# EAGLE board PCB (EAGLE 9.7.0)
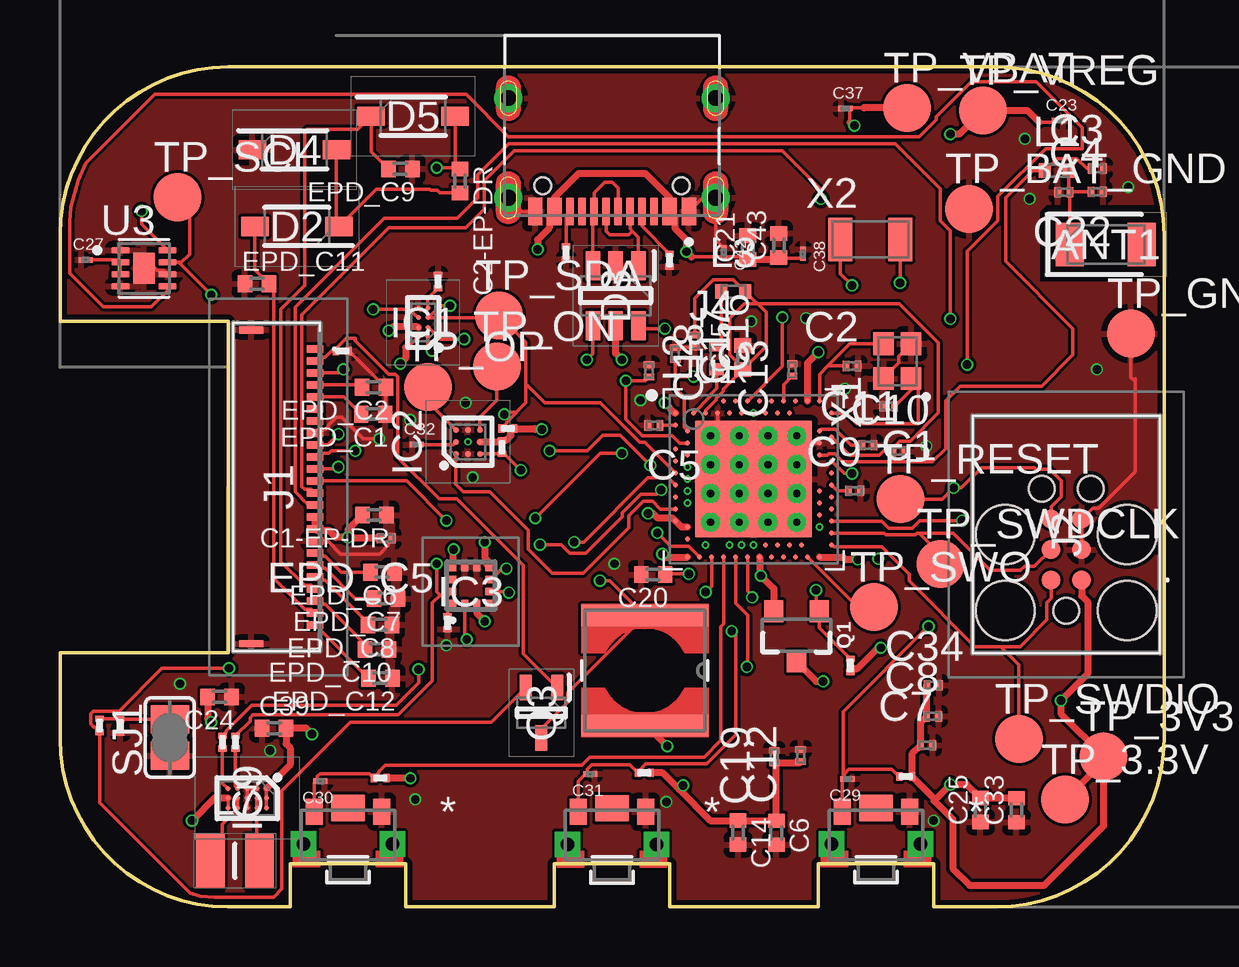
[diagram p0: board, top side]
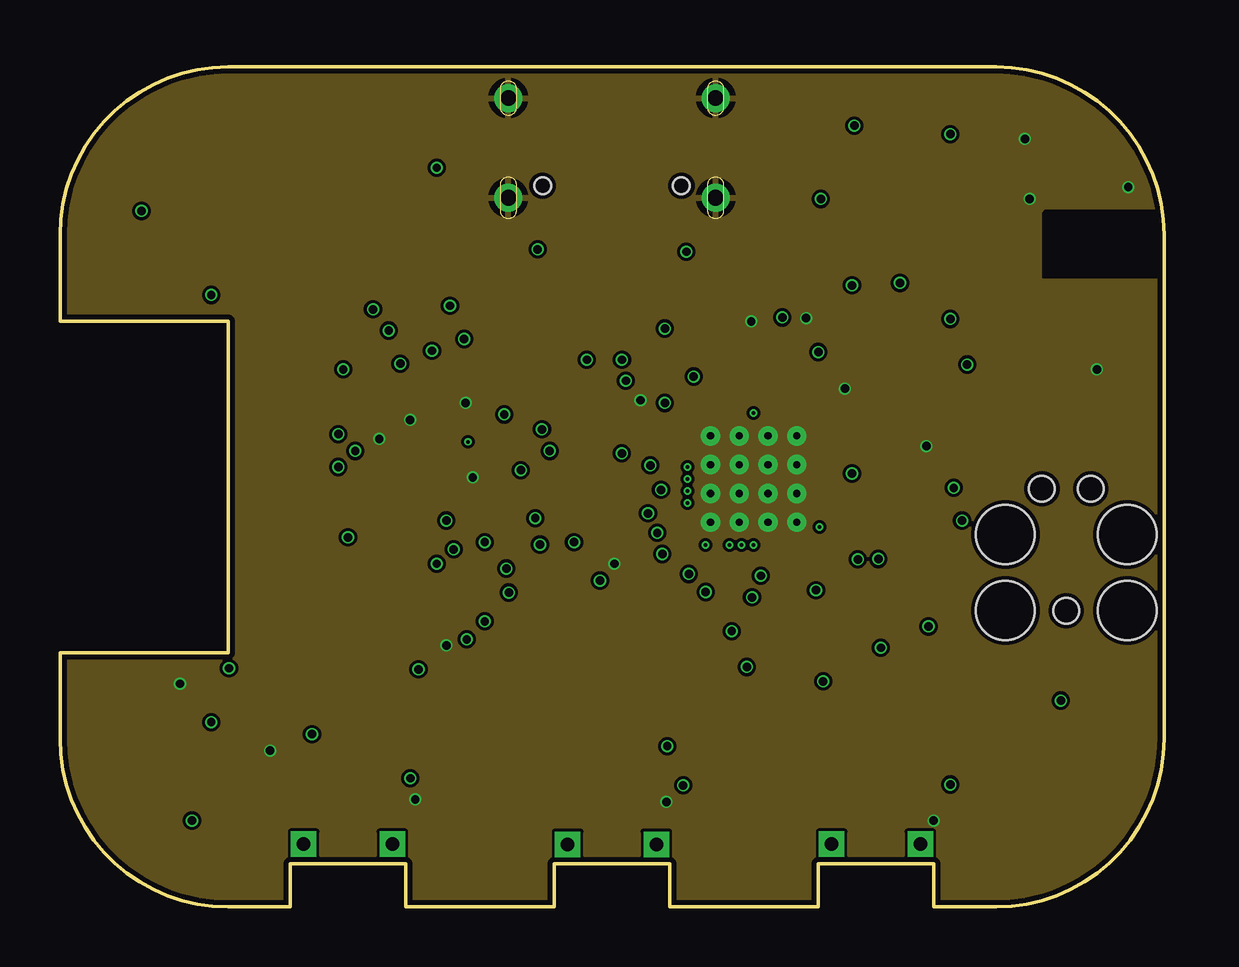
[diagram p1: board, inner layer Route2]
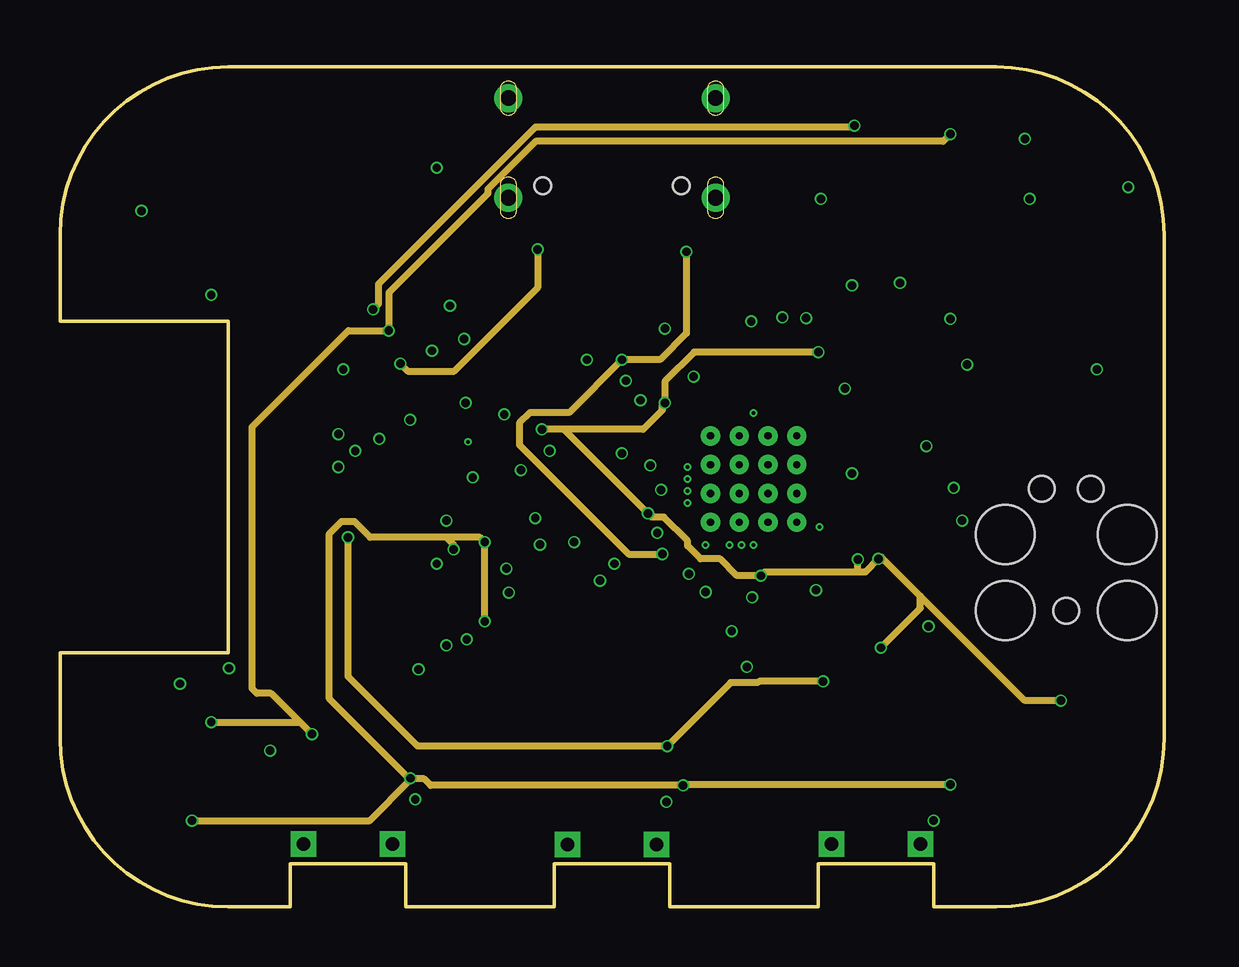
[diagram p2: board, inner layer Route15]
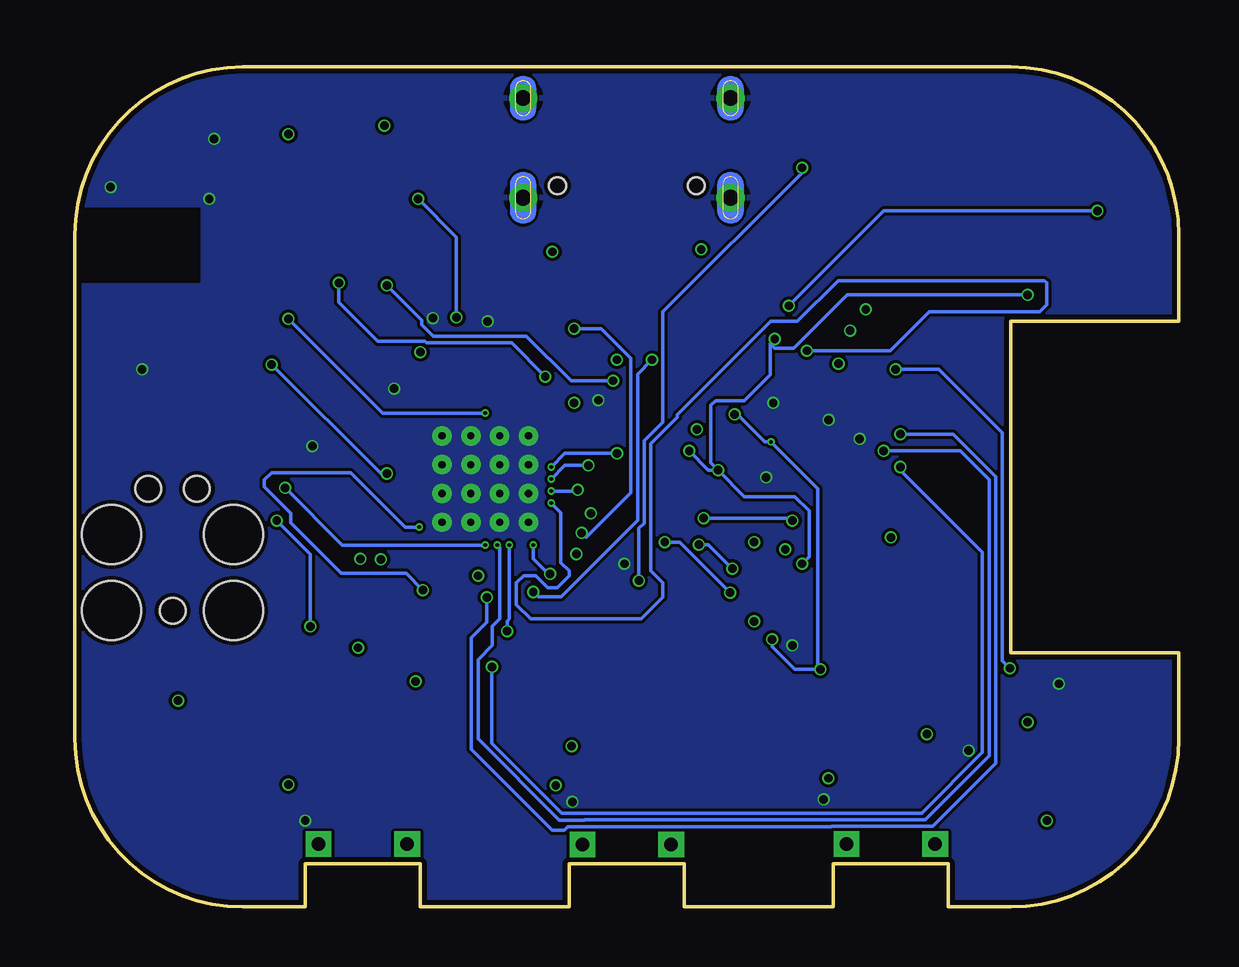
[diagram p3: board, bottom side, seen from below]

Size 46 x 35 mm. Coordinates in mm from the lower left corner, seen from the top.
Outline: 39,0 36.4,0 36.4,1.8 31.6,1.8 31.6,0 25.4,0 25.4,1.8 20.6,1.8 20.6,0 14.4,0 14.4,1.8 9.6,1.8 9.6,0 7,0 arc-90 0,7 0,10.6 7,10.6 7,24.4 0,24.4 0,28 arc-90 7,35 39,35 arc-90 46,28 46,7 arc-90 39,0
Copper layers (1+2*15+16): Top 0.035mm / dielectric 1.6mm / Route2 0.035mm / dielectric 0.15mm / Route15 0.035mm / dielectric 0.2mm / Bottom 0.035mm
Design rules "jlcpcb-2layers.dru *": minimum track width 5mil, minimum drill 0.3mm, track to track 5mil, track to pad 5mil, pad to pad 5mil, via to via 5mil, smd to smd 5mil, copper to edge 0.2mm, drill to drill 6mil, minimum pad ring 10mil, minimum via ring 3mil, stop-mask expansion 4mil, vias tented up to drill 0mil, thermal gap 10mil

## Footprints (pad centres in the part's own frame; a part is rotated, then mirrored left to right if it is on the bottom)
2450AT18B100E_ANTC3216X140N = smd 1.15 x 1.8: 1 -1.5,0; 2 1.5,0
NORDIC_NRF_3_RESC0201_L = smd 0.28 x 0.43: 1 -0.255,0; 2 0.255,0
PERFECT_0402_0402 = smd 0.6 x 0.7: 1 -0.5,0; 2 0.5,0
GRM011R60J152KE01L_2_CAPC0201X13N = smd 0.22 x 0.23: 1 -0.185,0; 2 0.185,0
ESP32_C6_LIBRARY_5_SOD3716X135N = smd 1.15 x 0.8: 1 -1.75,0; 2 1.75,0
ESP32_C6_LIBRARY_3_SOT95P280X145-6N = smd 1.2 x 0.6: 1 -1.25,0.95; 2 -1.25,0; 3 -1.25,-0.95; 4 1.25,-0.95; 5 1.25,0; 6 1.25,0.95
BQ25180YBGR_BGA8C40P2X4_100X155X50 = smd 0.2 x 0.2: A1 -0.2,0.6; A2 0.2,0.6; B1 -0.2,0.2; B2 0.2,0.2; C1 -0.2,-0.2; C2 0.2,-0.2; D1 -0.2,-0.6; D2 0.2,-0.6
DRV2605YZFR_BGA9C50P3X3_144X144X62 = smd 0.25 x 0.25: A1 -0.5,0.5; A2 0,0.5; A3 0.5,0.5; B1 -0.5,0; B2 0,0; B3 0.5,0; C1 -0.5,-0.5; C2 0,-0.5; C3 0.5,-0.5
BMA423_BMA423 = smd 0.3 x 0.35: 1 -0.75,-0.775; 2 -0.25,-0.775; 3 0.25,-0.775; 4 0.75,-0.775; 7 0.75,0.775; 8 0.25,0.775; 9 -0.25,0.775; 10 -0.75,0.775 | smd 0.35 x 0.3: 5 0.775,-0.25; 6 0.775,0.25; 11 -0.775,0.25; 12 -0.775,-0.25
RT6160AWSC_BGA15C40P3X5_140X230X60 = smd 0.216 x 0.216: A1 -0.4,0.8; A2 0,0.8; A3 0.4,0.8; B1 -0.4,0.4; B2 0,0.4; B3 0.4,0.4; C1 -0.4,0; C2 0,0; C3 0.4,0; D1 -0.4,-0.4; D2 0,-0.4; D3 0.4,-0.4; E1 -0.4,-0.8; E2 0,-0.8; E3 0.4,-0.8
503480-2400_5034802400 = smd 0.3 x 0.7: 1 -5.75,1.525; 2 -5.25,1.525; 3 -4.75,1.525; 4 -4.25,1.525; 5 -3.75,1.525; 6 -3.25,1.525; 7 -2.75,1.525; 8 -2.25,1.525; 9 -1.75,1.525; 10 -1.25,1.525; 11 -0.75,1.525; 12 -0.25,1.525; 13 0.25,1.525; 14 0.75,1.525; 15 1.25,1.525; 16 1.75,1.525; 17 2.25,1.525; 18 2.75,1.525; 19 3.25,1.525; 20 3.75,1.525; 21 4.25,1.525; 22 4.75,1.525; 23 5.25,1.525; 24 5.75,1.525 | smd 0.3 x 1: MP1 -6.54,-1.125; MP2 6.54,-1.125
TC2030-IDC_TC2030IDC = smd 0.783 x 0.783: 1 -0.953,-0.635; 2 -0.953,0.635; 3 0.317,-0.635; 4 0.317,0.635; 5 1.588,-0.635; 6 1.588,0.635 | hole 2.451: -2.223,-2.54; -2.223,2.54; 0.952,-2.54; 0.952,2.54 | hole 1.067: -2.223,0; 2.857,-1.016; 2.857,1.016
KH-TYPE-C-16P_KINGHELM_KH-TYPE-C-16P = smd 0.6 x 1.15: A1_B12 -3.2,4.725; A4_B9 -2.4,4.725; A9_B4 2.4,4.725; A12_B1 3.2,4.725 | smd 0.3 x 1.15: A5 -1.25,4.725; A6 -0.25,4.725; A7 0.25,4.725; A8 1.25,4.725; B5 1.75,4.725; B6 0.75,4.725; B7 -0.75,4.725; B8 -1.75,4.725 | drill 0.65 pad 1.05: SH1 -4.32,0; SH2 4.32,0; SH3 -4.32,4.15; SH4 4.32,4.15 | hole 0.7: -2.89,3.65; 2.89,3.65
NORDIC_NRF_2_RESC0402_L = smd 0.5 x 0.6: 1 -0.5,0; 2 0.5,0
ESP32_C6_LIBRARY_2_IND_4828-WE-TPC_WRE = smd 0.9 x 5.3: 1 -2.286,0; 2 2.286,0
MLP2016SR47MT0S1_INDC2016X100N = smd 1.2 x 2.2: 1 -1.028,0; 2 1.028,0
ESP32_C6_LIBRARY_4_ESP32_C6_LIBRARY_4_ESP32_C6_LIBRARY_4_ESP32_C6_LIBRARY_4_ESP32_WROVER_SPARKFUN-DISCRETESEMI_SOT23-3 = smd 0.8 x 0.9: 1 -0.95,-1; 2 0.95,-1; 3 0,1.1
ESP32_C6_LIBRARY_6_SOT65P210X110-3N = smd 1.05 x 0.5: 1 -1.05,0.65; 2 -1.05,-0.65; 3 1.05,0
ERA-1AEB3401C_0201 = smd 0.35 x 0.25: 1 0,0.275; 2 0,-0.275
ESP32_C6_LIBRARY_7_JUMPER_SJ = smd 1.168 x 1.6: 1 -0.762,0; 2 0.762,0
2025-10-22_07-23-44_LIBRARY_SW_EVP-AKE31A_PAN = smd 0.711 x 1.092: 1 -1.4,-0.972; 2 1.4,-0.972 | drill 0.559 pad 0.914 square: 3 -1.848,0.381; 4 1.848,0.381 | smd 1.397 x 1.092: 5 0,-1.124
HECTOR_WATCH_1_TP20R = smd 2 x 2: TP 0,0
NORDIC_NRF_4_AQFN50P700X700X85_HS-74N = smd 4.85 x 4.85: P$74 0,0 | drill 0.3 pad 0.6: P$75 -1.8,1.8; P$76 -0.6,1.8; P$77 0.6,1.8; P$78 1.8,1.8; P$79 -1.8,0.6; P$80 -0.6,0.6; P$81 0.6,0.6; P$82 1.8,0.6; P$83 -1.8,-0.6; P$84 -0.6,-0.6; P$85 0.6,-0.6; P$86 1.8,-0.6; P$87 -1.8,-1.8; P$88 -0.6,-1.8; P$89 0.6,-1.8; P$90 1.8,-1.8 | smd 0.2 x 0.2: P$A8 -1.25,3.25; P$A10 -0.75,3.25; P$A12 -0.25,3.25; P$A14 0.25,3.25; P$A16 0.75,3.25; P$A18 1.25,3.25; P$A20 1.75,3.25; P$A22 2.25,3.25; P$A23 2.75,3.25; P$AA24 3.25,-2.25; P$AB2 -2.75,-2.5; P$AC5 -2,-2.75; P$AC9 -1,-2.75; P$AC11 -0.5,-2.75; P$AC13 0,-2.75; P$AC15 0.5,-2.75; P$AC17 1,-2.75; P$AC19 1.5,-2.75; P$AC21 2,-2.75; P$AC24 3.25,-2.75; P$AD2 -2.75,-3.25; P$AD4 -2.25,-3.25; P$AD6 -1.75,-3.25; P$AD8 -1.25,-3.25; P$AD10 -0.75,-3.25; P$AD12 -0.25,-3.25; P$AD14 0.25,-3.25; P$AD16 0.75,-3.25; P$AD18 1.25,-3.25; P$AD20 1.75,-3.25; P$AD22 2.25,-3.25; P$AD23 2.75,-3.25; P$B1 -3.25,2.75; P$B3 -2.5,2.75; P$B5 -2,2.75; P$B7 -1.5,2.75; P$B9 -1,2.75; P$B11 -0.5,2.75; P$B13 0,2.75; P$B15 0.5,2.75; P$B17 1,2.75; P$B19 1.5,2.75; P$B24 3.25,2.75; P$C1 -3.25,2.25; P$D2 -2.75,2; P$D23 2.75,2; P$E24 3.25,1.75; P$F2 -2.75,1.5; P$F23 2.75,1.5; P$G1 -3.25,1.25; P$H2 -2.75,1; P$H23 2.75,1; P$J1 -3.25,0.75; P$J24 3.25,0.75; P$K2 -2.75,0.5; P$L1 -3.25,0.25; P$L24 3.25,0.25; P$M2 -2.75,0; P$N1 -3.25,-0.25; P$N24 3.25,-0.25; P$P2 -2.75,-0.5; P$P23 2.75,-0.5; P$R1 -3.25,-0.75; P$R24 3.25,-0.75; P$T2 -2.75,-1; P$T23 2.75,-1; P$U1 -3.25,-1.25; P$U24 3.25,-1.25; P$V23 2.75,-1.5; P$W1 -3.25,-1.75; P$W24 3.25,-1.75; P$Y2 -2.75,-2; P$Y23 2.75,-2
ESP32_C6_LIBRARY_SON50P200X200X80-9N = smd 0.76 x 0.27: 1 -0.985,0.75; 2 -0.985,0.25; 3 -0.985,-0.25; 4 -0.985,-0.75; 5 0.985,-0.75; 6 0.985,-0.25; 7 0.985,0.25; 8 0.985,0.75 | smd 0.9 x 1.3: 9 0,0
NORDIC_NRF_BT-XTAL_2016_N = smd 0.95 x 0.85: 1 -0.725,-0.575; 2 0.725,-0.575; 3 0.725,0.575; 4 -0.725,0.575
NORDIC_NRF_1_XTAL_3215_N = smd 1 x 1.8: 1 -1.25,0; 2 1.25,0

## Placement (x,y rotation side)
ANT1  2450AT18B100E  [2450AT18B100E_ANTC3216X140N]  43.57,27.6 0 top
C1  12pF  [NORDIC_NRF_3_RESC0201_L]  34.52,20.86 180 top
C1-EP-DR  10uF  [PERFECT_0402_0402]  13.1,16.33 180 top
C2  12pF  [NORDIC_NRF_3_RESC0201_L]  33,22.54 0 top
C2-EP-DR  4.7uF/25V  [PERFECT_0402_0402]  16.67,30.25 270 top
C3  1pF  [NORDIC_NRF_3_RESC0201_L]  43.22,30.77 0 top
C4  1pF  [NORDIC_NRF_3_RESC0201_L]  43.21,29.8 0 top
C5  100nF  [NORDIC_NRF_3_RESC0201_L]  24.74,20.06 180 top
C6  4.7µF  [PERFECT_0402_0402]  29.85,3.09 270 top
C7  100nF  [NORDIC_NRF_3_RESC0201_L]  36.11,6.74 0 top
C8  100nF  [NORDIC_NRF_3_RESC0201_L]  36.36,7.94 0 top
C9  820pF  [NORDIC_NRF_3_RESC0201_L]  33.11,17.34 0 top
C10  N.C  [NORDIC_NRF_3_RESC0201_L]  34.96,18.99 0 top
C11  100pF  [NORDIC_NRF_3_RESC0201_L]  33.66,19.24 0 top
C12  100pF  [NORDIC_NRF_3_RESC0201_L]  30.86,6.31 90 top
C13  N.C  [NORDIC_NRF_3_RESC0201_L]  30.51,22.38 90 top
C14  4.7µF  [PERFECT_0402_0402]  28.25,3.1 270 top
C15  1.0µF  [PERFECT_0402_0402]  28.45,22.89 90 top
C16  47nF  [NORDIC_NRF_3_RESC0201_L]  26.44,23.58 270 top
C17  12pF  [NORDIC_NRF_3_RESC0201_L]  25.64,23.06 270 top
C18  12pF  [NORDIC_NRF_3_RESC0201_L]  24.54,22.34 270 top
C19  100nF  [NORDIC_NRF_3_RESC0201_L]  29.76,6.26 90 top
C20  4.7µF  [PERFECT_0402_0402]  24.72,13.85 180 top
C21  4.7µF  [PERFECT_0402_0402]  28.65,27.47 90 top
C22  N.C  [NORDIC_NRF_3_RESC0201_L]  41.83,29.78 180 top
C23  0.1uF  [GRM011R60J152KE01L_2_CAPC0201X13N]  41.61,32.76 0 top
C24  10uF  [PERFECT_0402_0402]  6.65,8.75 180 top
C25  22uF  [PERFECT_0402_0402]  38.35,4.04 90 top
C27  0.1uF  [GRM011R60J152KE01L_2_CAPC0201X13N]  1.07,26.96 0 top
C29  1uF  [GRM011R60J152KE01L_2_CAPC0201X13N]  32.81,5.34 180 top
C30  1uF  [GRM011R60J152KE01L_2_CAPC0201X13N]  10.85,5.24 180 top
C31  1uF  [GRM011R60J152KE01L_2_CAPC0201X13N]  22.09,5.54 180 top
C32  1uF  [GRM011R60J152KE01L_2_CAPC0201X13N]  14.87,19.26 0 top
C33  22uF  [PERFECT_0402_0402]  39.85,4.03 90 top
C34  0.1uF  [NORDIC_NRF_3_RESC0201_L]  36.38,9.24 0 top
C37  1uF  [GRM011R60J152KE01L_2_CAPC0201X13N]  32.73,33.26 0 top
C38  1uF  [GRM011R60J152KE01L_2_CAPC0201X13N]  30.96,27.21 270 top
C39  10uF  [PERFECT_0402_0402]  8.92,7.45 0 top
C42  0.1uF  [GRM011R60J152KE01L_2_CAPC0201X13N]  27.66,27.27 270 top
C43  4.7µF  [PERFECT_0402_0402]  29.95,27.56 90 top
D2  MBR0530  [ESP32_C6_LIBRARY_5_SOD3716X135N]  9.87,28.35 180 top
D3  USBLC6-2SC6Y  [ESP32_C6_LIBRARY_3_SOT95P280X145-6N]  23.15,25.47 270 top
D4  MBR0530  [ESP32_C6_LIBRARY_5_SOD3716X135N]  9.77,31.55 0 top
D5  MBR0530  [ESP32_C6_LIBRARY_5_SOD3716X135N]  14.71,32.95 0 top
EPD_C1  1uF/50V  [PERFECT_0402_0402]  13.05,20.53 180 top
EPD_C2  1uF/50V  [PERFECT_0402_0402]  13.08,21.65 180 top
EPD_C5  0.1uF/50V  [NORDIC_NRF_3_RESC0201_L]  13.59,15.36 180 top
EPD_C6  1uF/50V  [PERFECT_0402_0402]  13.43,13.95 180 top
EPD_C7  1uF/50V  [PERFECT_0402_0402]  13.58,12.85 180 top
EPD_C8  1uF/50V  [PERFECT_0402_0402]  13.33,11.75 180 top
EPD_C9  1uF/50V  [PERFECT_0402_0402]  14.18,30.75 180 top
EPD_C10  1uF/50V  [PERFECT_0402_0402]  13.2,10.73 180 top
EPD_C11  1uF/50V  [PERFECT_0402_0402]  8.2,25.97 0 top
EPD_C12  1uF/50V  [PERFECT_0402_0402]  13.35,9.53 180 top
IC1  BQ25180YBGR  [BQ25180YBGR_BGA8C40P2X4_100X155X50]  15.13,24.35 180 top
IC2  DRV2605YZFR  [DRV2605YZFR_BGA9C50P3X3_144X144X62]  17,19.38 90 top
IC3  BMA421  [BMA423_BMA423]  17.12,13.39 0 top
IC9  RT6160AWSC  [RT6160AWSC_BGA15C40P3X5_140X230X60]  7.8,4.53 270 top
J1  503480-2400  [503480-2400_5034802400]  9.1,17.5 270 top
J2  TC2030-IDC  [TC2030-IDC_TC2030IDC]  41.93,14.57 90 top
J4  KH-TYPE-C-16P  [KH-TYPE-C-16P_KINGHELM_KH-TYPE-C-16P]  23,33.7 180 top
L1  3.9nH  [NORDIC_NRF_2_RESC0402_L]  41.54,30.68 0 top
L2  10nH  [NORDIC_NRF_2_RESC0402_L]  27.36,22.91 90 top
L3  15nH  [NORDIC_NRF_2_RESC0402_L]  28.06,25.64 0 top
L5  68uH  [ESP32_C6_LIBRARY_2_IND_4828-WE-TPC_WRE]  24.37,9.85 270 top
L7  FTC252012SR47MBCA  [MLP2016SR47MT0S1_INDC2016X100N]  7.29,1.92 180 top
Q1  20V/4.2A/52mΩ/1.4W  [ESP32_C6_LIBRARY_4_ESP32_C6_LIBRARY_4_ESP32_C6_LIBRARY_4_ESP32_C6_LIBRARY_4_ESP32_WROVER_SPARKFUN-DISCRETESEMI_SOT23-3]  30.69,11.32 180 top
Q3  SI1308EDL-T1-GE3  [ESP32_C6_LIBRARY_6_SOT65P210X110-3N]  20.06,8.09 270 top
R1_EP_DR  0.47  [ERA-1AEB3401C_0201]  1.65,7.56 0 top
R1_USB  5K1  [ERA-1AEB3401C_0201]  25.39,26.94 180 top
R2  0  [ERA-1AEB3401C_0201]  6.77,6.86 0 top
R2_EP_DR  10K  [ERA-1AEB3401C_0201]  11.76,23.17 270 top
R2_USB  5K1  [ERA-1AEB3401C_0201]  21.09,27.26 0 top
R3  0  [ERA-1AEB3401C_0201]  16.15,11.84 180 top
R4  0  [ERA-1AEB3401C_0201]  7.31,6.86 0 top
R5  10K  [ERA-1AEB3401C_0201]  13.34,5.37 90 top
R7  10K  [ERA-1AEB3401C_0201]  35.24,5.43 90 top
R8  10K  [ERA-1AEB3401C_0201]  24.34,5.59 90 top
R9  10K  [ERA-1AEB3401C_0201]  15.75,26.06 0 top
R17  3k3  [ERA-1AEB3401C_0201]  18.41,19.16 0 top
R18  3k3  [ERA-1AEB3401C_0201]  18.66,19.93 270 top
R_PWR_EPD  10K  [ERA-1AEB3401C_0201]  32.93,10.06 0 top
R_TYPE_SEL  2.2  [ERA-1AEB3401C_0201]  2.51,7.54 180 top
SJ1  [ESP32_C6_LIBRARY_7_JUMPER_SJ]  4.58,7.06 90 top
SW_DN  2025-10-22_07-23-44_LIBRARY_EVP-AKE31ASW_EVP-AKE31A_PAN  [2025-10-22_07-23-44_LIBRARY_SW_EVP-AKE31A_PAN]  34,3 180 top
SW_ENT  2025-10-22_07-23-44_LIBRARY_EVP-AKE31ASW_EVP-AKE31A_PAN  [2025-10-22_07-23-44_LIBRARY_SW_EVP-AKE31A_PAN]  23,2.99 180 top
SW_UP  2025-10-22_07-23-44_LIBRARY_EVP-AKE31ASW_EVP-AKE31A_PAN  [2025-10-22_07-23-44_LIBRARY_SW_EVP-AKE31A_PAN]  12,3 180 top
TP_3.3V  HECTOR_WATCH_1_TPTP20R  [HECTOR_WATCH_1_TP20R]  41.88,4.47 0 top
TP_3V3  HECTOR_WATCH_1_TPTP20R  [HECTOR_WATCH_1_TP20R]  43.48,6.27 0 top
TP_BAT_GND  HECTOR_WATCH_1_TPTP20R  [HECTOR_WATCH_1_TP20R]  37.88,29.09 0 top
TP_GND  HECTOR_WATCH_1_TPTP20R  [HECTOR_WATCH_1_TP20R]  44.62,23.89 0 top
TP_ON  HECTOR_WATCH_1_TPTP20R  [HECTOR_WATCH_1_TP20R]  18.2,22.51 0 top
TP_OP  HECTOR_WATCH_1_TPTP20R  [HECTOR_WATCH_1_TP20R]  15.34,21.67 0 top
TP_RESET  HECTOR_WATCH_1_TPTP20R  [HECTOR_WATCH_1_TP20R]  35.02,16.99 0 top
TP_SCL  HECTOR_WATCH_1_TPTP20R  [HECTOR_WATCH_1_TP20R]  4.9,29.57 0 top
TP_SDA  HECTOR_WATCH_1_TPTP20R  [HECTOR_WATCH_1_TP20R]  18.29,24.64 0 top
TP_SWDCLK  HECTOR_WATCH_1_TPTP20R  [HECTOR_WATCH_1_TP20R]  36.68,14.29 0 top
TP_SWDIO  HECTOR_WATCH_1_TPTP20R  [HECTOR_WATCH_1_TP20R]  39.95,6.99 0 top
TP_SWO  HECTOR_WATCH_1_TPTP20R  [HECTOR_WATCH_1_TP20R]  33.91,12.49 0 top
TP_VBAT  HECTOR_WATCH_1_TPTP20R  [HECTOR_WATCH_1_TP20R]  35.3,33.29 0 top
TP_VREG  HECTOR_WATCH_1_TPTP20R  [HECTOR_WATCH_1_TP20R]  38.46,33.19 0 top
U1  NRF52840_QF  [NORDIC_NRF_4_AQFN50P700X700X85_HS-74N]  28.9,17.83 0 top
U3  MAX17048G+T10  [ESP32_C6_LIBRARY_SON50P200X200X80-9N]  3.5,26.61 0 top
X1  32MHz  [NORDIC_NRF_BT-XTAL_2016_N]  34.89,22.74 90 top
X2  32.768kHz  [NORDIC_NRF_1_XTAL_3215_N]  33.77,27.81 0 top

## Library data of the parts
ANT1 = proiect; ARROW_PART_NUMBER: 2450AT18B100E; ARROW_PRICE-STOCK: https://www.arrow.com/en/products/2450at18b100e/johanson-dielectrics?utm_currency=USD&region=nac; DESCRIPTION: Antennas 2.45GHz ANTENNA; HEIGHT: 1.4mm; MANUFACTURER_NAME: JOHANSON TECHNOLOGY; MANUFACTURER_PART_NUMBER: 2450AT18B100E; MOUSER_PART_NUMBER: 609-2450AT18B100E; MOUSER_PRICE-STOCK: https://www.mouser.co.uk/ProductDetail/Johanson-Technology/2450AT18B100E?qs=yCnrNFeXz%252Bh5MFsFIXGZGA%3D%3D
C1 C1-EP-DR C2 C2-EP-DR C3-C8 C10-C22 C24 C25 C33 C34 C39 C43 EPD_C1 EPD_C2 EPD_C5-EPD_C12 L1-L3 R1_EP_DR R1_USB R2 R2_EP_DR R2_USB R3-R5 R7-R9 R17 R18 R_PWR_EPD R_TYPE_SEL SJ1 TP_3.3V TP_3V3 TP_BAT_GND TP_GND TP_ON TP_OP TP_RESET TP_SCL TP_SDA TP_SWDCLK TP_SWDIO TP_SWO TP_VBAT TP_VREG U1 X1 X2 = proiect
C9 = InkTime_v5
C23 C27 C29-C32 C37 C38 C42 = proiect; AVAILABILITY: In Stock; CHECK_PRICES: https://www.snapeda.com/parts/GRM011R60J152KE01L/Murata/view-part/?ref=eda; DESCRIPTION: SMD Capacitor X5R(EIA) with Capacitance: 1500pF Tol. 10%. Rated Voltage: 6.3Vdc; MF: Murata; MP: GRM011R60J152KE01L; PACKAGE: 0201 Murata; PRICE: None; SNAPEDA_LINK: https://www.snapeda.com/parts/GRM011R60J152KE01L/Murata/view-part/?ref=snap
D2 D4 D5 = proiect; AVAILABILITY: In Stock; CHECK_PRICES: https://www.snapeda.com/parts/MBR0530/Onsemi/view-part/?ref=eda; DESCRIPTION: Diode Schottky 30 V 500mA Surface Mount SOD-123; MF: ON Semiconductor; MP: MBR0530; PACKAGE: SOD-123-2 ON Semiconductor; PRICE: None; PURCHASE-URL: https://www.snapeda.com/api/url_track_click_mouser/?unipart_id=179458&manufacturer=ON Semiconductor&part_name=MBR0530&search_term=None; SNAPEDA_LINK: https://www.snapeda.com/parts/MBR0530/Onsemi/view-part/?ref=snap
D3 = proiect; AVAILABILITY: In Stock; CHECK_PRICES: https://www.snapeda.com/parts/USBLC6-2SC6Y/STMicroelectronics/view-part/?ref=eda; DESCRIPTION: 17V Clamp 5A (8/20µs) Ipp Tvs Diode Surface Mount SOT-23-6; MF: STMicroelectronics; MP: USBLC6-2SC6Y; PACKAGE: SOT-23-6 STMicroelectronics; PRICE: None; SNAPEDA_LINK: https://www.snapeda.com/parts/USBLC6-2SC6Y/STMicroelectronics/view-part/?ref=snap
IC1 = proiect; ARROW_PART_NUMBER: BQ25180YBGR; ARROW_PRICE-STOCK: https://www.arrow.com/en/products/bq25180ybgr/texas-instruments?utm_currency=USD&region=nac; DESCRIPTION: Charger IC Lithium Ion/Polymer, Lithium Iron Phosphate 8-DSBGA (1.6x1.1); HEIGHT: 0.5mm; MANUFACTURER_NAME: Texas Instruments; MANUFACTURER_PART_NUMBER: BQ25180YBGR; MOUSER_PART_NUMBER: 595-BQ25180YBGR; MOUSER_PRICE-STOCK: https://www.mouser.co.uk/ProductDetail/Texas-Instruments/BQ25180YBGR?qs=doiCPypUmgEWjAK%252BJAX6Tw%3D%3D
IC2 = proiect; ARROW_PART_NUMBER: DRV2605YZFR; ARROW_PRICE-STOCK: https://www.arrow.com/en/products/drv2605yzfr/texas-instruments?region=nac; DESCRIPTION: Haptic Driver for ERM/LRA with Built-In Library and Smart Loop Architecture; HEIGHT: 0.625mm; MANUFACTURER_NAME: Texas Instruments; MANUFACTURER_PART_NUMBER: DRV2605YZFR
IC3 = proiect; ARROW_PART_NUMBER: BMA423; ARROW_PRICE-STOCK: https://www.arrow.com/en/products/bma423/bosch; DESCRIPTION: Accelerometers Triaxial low-g 12bit Acceleration Sensor; HEIGHT: 1mm; MANUFACTURER_NAME: BOSCH; MANUFACTURER_PART_NUMBER: BMA423; MOUSER_PART_NUMBER: 262-BMA423; MOUSER_PRICE-STOCK: https://www.mouser.co.uk/ProductDetail/Bosch-Sensortec/BMA423?qs=HXFqYaX1Q2xC%252BSgeGoX3mg%3D%3D
IC9 = proiect; DESCRIPTION: Buck-Boost Regulator Positive Output Step-Up/Step-Down I2C DC-DC Controller IC 15-WL-CSP (BSC) (1.4x2.3); HEIGHT: 0.6mm; MANUFACTURER_NAME: RICHTEK; MANUFACTURER_PART_NUMBER: RT6160AWSC; MOUSER_PART_NUMBER: 835-RT6160AWSC; MOUSER_PRICE-STOCK: https://www.mouser.co.uk/ProductDetail/Richtek/RT6160AWSC?qs=amGC7iS6iy%2FLd9PSoixZXQ%3D%3D
J1 = proiect; DESCRIPTION: FFC & FPC Connectors 0.5mm FPC RA SMT Dual Contact 24Ckt; HEIGHT: 1.87mm; MANUFACTURER_NAME: Molex; MANUFACTURER_PART_NUMBER: 503480-2400; MOUSER_PART_NUMBER: 538-503480-2400; MOUSER_PRICE-STOCK: https://www.mouser.co.uk/ProductDetail/Molex/503480-2400?qs=OAhjpuo3Vu7efIoxFh9AOw%3D%3D
J2 = proiect; DESCRIPTION: CABLE ADAPTER 6 POS; HEIGHT: 19mm; MANUFACTURER_NAME: Tag Connect; MANUFACTURER_PART_NUMBER: TC2030-IDC
J4 = proiect; AVAILABILITY: Not in stock; CHECK_PRICES: https://www.snapeda.com/parts/KH-TYPE-C-16P/Kinghelm/view-part/?ref=eda; MF: kinghelm; MP: KH-TYPE-C-16P; PACKAGE: None; PRICE: None; SNAPEDA_LINK: https://www.snapeda.com/parts/KH-TYPE-C-16P/Kinghelm/view-part/?ref=snap
L5 = proiect; COPYRIGHT: Copyright (C) 2024 Ultra Librarian. All rights reserved.; MANUFACTURER_PART_NUMBER: 744043680; MFR_NAME: Wurth Electronics
L7 = proiect; DESCRIPTION: SMD / SMT Inductors (Coils), L=0.47?H, L x W x T :; HEIGHT: 1mm; JLCPCB: https://jlcpcb.com/partdetail/6763488-FTC252012SR47MBCA/C5832368; MANUFACTURER_NAME: TDK; MANUFACTURER_PART_NUMBER: FTC252012SR47MBCA
Q1 = proiect; PROD_ID: TRAN-14388
Q3 = proiect; AVAILABILITY: In Stock; CHECK_PRICES: https://www.snapeda.com/parts/SI1308EDL-T1-GE3/Vishay+Siliconix/view-part/?ref=eda; DESCRIPTION: Si1308EDL-T1-GE3 N-channel MOSFET Transistor, 1.5 A, 30 V, 3-Pin SC-70 | Siliconix / Vishay SI1308EDL-T1-GE3; MF: Vishay Siliconix; MP: SI1308EDL-T1-GE3; PACKAGE: SOT-323 Vishay Semiconductor; PRICE: None; PURCHASE-URL: https://www.snapeda.com/api/url_track_click_mouser/?unipart_id=274603&manufacturer=Vishay Siliconix&part_name=SI1308EDL-T1-GE3&search_term=None; SNAPEDA_LINK: https://www.snapeda.com/parts/SI1308EDL-T1-GE3/Vishay+Siliconix/view-part/?ref=snap
SW_DN SW_ENT SW_UP = proiect; COPYRIGHT: Copyright (C) 2025 Ultra Librarian. All rights reserved.; DIGI-KEY_PART_NUMBER_1: P123437TR-ND; DIGI-KEY_PART_NUMBER_2: P123437CT-ND; DIGI-KEY_PART_NUMBER_3: P123437DKR-ND; MANUFACTURER_NAME: Panasonic; MANUFACTURER_PART_NUMBER: EVP-AKE31A
U3 = proiect; AVAILABILITY: In Stock; CHECK_PRICES: https://www.snapeda.com/parts/MAX17048G+T10/Analog+Devices/view-part/?ref=eda; DESCRIPTION: 3µA 1-Cell/2-Cell Fuel Gauge with ModelGauge; MF: Analog Devices; MP: MAX17048G+T10; PACKAGE: TDFN-8 Maxim; PRICE: None; PURCHASE-URL: https://www.snapeda.com/api/url_track_click_mouser/?unipart_id=329239&manufacturer=Analog Devices&part_name=MAX17048G+T10&search_term=None; SNAPEDA_LINK: https://www.snapeda.com/parts/MAX17048G+T10/Analog+Devices/view-part/?ref=snap

## Nets
3V3: C6.1 C7.1 C8.1 C12.1 C14.1 C19.1 C25.2 C33.2 C34.1 IC2.C2 IC3.3 IC3.7 IC3.10 IC9.E2 IC9.E3 J2.1 Q1.2 R5.2 R7.2 R8.2 R17.1 R18.1 R_PWR_EPD.2 TP_3.3V.TP TP_3V3.TP U1.P$A22 U1.P$AD14 U1.P$AD23 U1.P$B1 U1.P$W1 U1.P$Y2
ALERT: U1.P$J24 U3.5
D+: D3.4 U1.P$AD6
D-: D3.6 U1.P$AD4
DN: D3.1 J4.A7 J4.B7
DP: D3.3 J4.A6 J4.B6
EPD_3V3: C1-EP-DR.2 EPD_C5.2 J1.15 J1.16 L5.2 Q1.3
EPD_BUSY: J1.9 U1.P$AD12
EPD_CS: J1.12 U1.P$K2
EPD_DC: J1.11 U1.P$AD10
EPD_RST: J1.10 U1.P$AC11
GDR: J1.2 Q3.1 R2_EP_DR.2
GND: C1-EP-DR.1 C1.2 C2.2 C3.2 C4.2 C5.2 C6.2 C7.2 C8.2 C9.2 C10.2 C11.2 C12.2 C13.2 C14.2 C15.2 C16.2 C17.1 C18.1 C19.2 C20.2 C21.2 C22.2 C23.2 C24.1 C25.1 C27.1 C29.1 C30.1 C31.1 C32.1 C33.1 C34.2 C37.1 C38.1 C39.1 C42.1 C43.2 D3.2 D4.1 EPD_C1.1 EPD_C2.1 EPD_C5.1 EPD_C6.1 EPD_C7.1 EPD_C8.1 EPD_C9.1 EPD_C10.1 EPD_C11.1 EPD_C12.1 IC1.D2 IC2.B1 IC2.B3 IC3.8 IC3.9 IC9.B1 IC9.C1 IC9.C2 IC9.C3 J1.8 J1.17 J1.MP1 J1.MP2 J2.3 J2.5 J4.A1_B12 J4.A12_B1 J4.SH1 J4.SH2 J4.SH3 J4.SH4 R1_USB.1 R2_EP_DR.1 R2_USB.2 R3.1 R9.1 R_TYPE_SEL.1 SJ1.1 SW_DN.1 SW_ENT.1 SW_UP.1 TP_BAT_GND.TP TP_GND.TP U1.P$74 U1.P$75 U1.P$76 U1.P$77 U1.P$78 U1.P$79 U1.P$80 U1.P$81 U1.P$82 U1.P$83 U1.P$84 U1.P$85 U1.P$86 U1.P$87 U1.P$88 U1.P$89 U1.P$90 U1.P$B7 U1.P$F23 U3.1 U3.4 U3.6 U3.9 X1.2 X1.4
HAPTIC_EN: IC2.A1 U1.P$U1
IMU_INT1: IC3.5 U1.P$N1
IMU_INT2: IC3.6 U1.P$P2
LX1: IC9.B2 IC9.B3 L7.1
LX2: IC9.D2 IC9.D3 L7.2
MOSI: J1.14 U1.P$B13
N$1: IC1.D1 R9.2
N$2: C9.1 U1.P$N24
N$3: IC9.D1 R4.2
N$4: C20.1 U1.P$AC5
N$5: ANT1.1 C4.1 C22.1 L1.2
N$6: L2.2 L3.1
N$7: IC9.E1 R2.2
N$8: C5.1 U1.P$C1
N$9: C2-EP-DR.1 D5.2 L5.1 Q3.3
N$10: IC3.1 R3.2
N$11: C17.2 U1.P$D2 X2.2
N$12: C18.2 U1.P$F2 X2.1
N$13: C2-EP-DR.2 D2.1 D4.2
N$14: R1_EP_DR.1 R_TYPE_SEL.2 SJ1.2
N$15: EPD_C2.2 J1.4
N$16: C32.2 IC2.A2
N$17: EPD_C6.2 J1.18
N$18: J4.A5 R1_USB.2
N$19: C3.1 L1.1 U1.P$H23
N$20: C1.1 U1.P$B24 X1.1
N$21: C2.1 U1.P$A23 X1.3
N$22: J4.B5 R2_USB.1
N$23: C11.1 U1.P$D23
N$24: L2.1 U1.P$B3
N$25: EPD_C1.2 J1.5
N$26: C10.1 C15.1 C16.1 L3.2 U1.P$B5 U1.P$E24
N$27: C13.1 U1.P$A18
N$28: EPD_C8.2 J1.20
N$29: EPD_C7.2 J1.19
N$30: EPD_C10.2 J1.22
N$31: EPD_C12.2 J1.24
N$32: C27.2 U3.2 U3.3
OUT+: IC2.A3 TP_OP.TP
OUT-: IC2.C3 TP_ON.TP
P0.04: U1.P$J1
P0.09: U1.P$L24
P0.13: C30.2 R5.1 SW_UP.2 U1.P$AD8
P0.14: C31.2 R8.1 SW_ENT.2 U1.P$AC9
P0.19: U1.P$AC15
P0.20: U1.P$AD16
P0.21: U1.P$AC17
P0.22: U1.P$AD18
P0.23: U1.P$AC19
P0.24: U1.P$AD20
P0.25: U1.P$AC21
P0.26: U1.P$G1
P0.27: U1.P$H2
P0.28: U1.P$B11
P0.29: U1.P$A10
P0.30: U1.P$B9
P0.31: U1.P$A8
P1.01: Q1.1 R_PWR_EPD.1 U1.P$Y23
P1.02: C29.2 R7.1 SW_DN.2 U1.P$W24
P1.03: U1.P$V23
P1.04: U1.P$U24
P1.05: U1.P$T23
P1.06: U1.P$R24
P1.07: U1.P$P23
P1.09: U1.P$R1
P1.10: U1.P$A20
P1.11: U1.P$B19
P1.12: U1.P$B17
P1.13: U1.P$A16
P1.14: U1.P$B15
P1.15: U1.P$A14
PMIC_INT: IC1.A1 U1.P$T2
PREVGH: D5.1 EPD_C9.2 J1.21
PREVGL: D2.2 EPD_C11.2 J1.23
RESE: J1.3 Q3.2 R1_EP_DR.2
RESET: J2.6 TP_RESET.TP U1.P$AC13
SCK: J1.13 U1.P$A12
SCL: IC1.B1 IC2.C1 IC3.12 R4.1 R17.2 TP_SCL.TP U1.P$M2 U3.7
SDA: IC1.C1 IC2.B2 IC3.2 R2.1 R18.2 TP_SDA.TP U1.P$L1 U3.8
SWDCLK: J2.4 TP_SWDCLK.TP U1.P$AA24
SWDIO: J2.2 TP_SWDIO.TP U1.P$AC24
SWO: TP_SWO.TP U1.P$AD22
VBAT: C37.2 IC1.C2 TP_VBAT.TP
VBUS: C21.1 C38.2 C42.2 C43.1 D3.5 IC1.A2 J4.A4_B9 J4.A9_B4 U1.P$AD2
VREG: C23.1 C24.2 C39.2 IC1.B2 IC9.A1 IC9.A2 IC9.A3 TP_VREG.TP

## Tracks (layer width: path | path; a pad name or v marks a point on that pad's centre or on a via)
3V3  (via drill 0.35)
  Top 0.15: IC9.E2 IC9.E3 | 43.48,6.07 43.48,6.1
  Top 0.3: J2.1 42.56,12.96 42.81,12.71 42.81,9.71 v41.7,8.6 41.7,8.05 TP_3V3.TP | 36.47,4.47 R7.2 35.52,6.4 C7.1 35.86,7.69 C8.1 36.11,9.22 C34.1 | TP_3V3.TP 43.48,6.1 43.48,3.38 41,0.9 37.9,0.9 37.2,1.6 37.2,3.64 36.42,4.42 36.47,4.47 | 36.47,4.47 v37.1,5.1 37.79,5.1 C25.2 C33.2 | 25.8,4.9 25.11,5.59 R8.2 | R5.2 14.02,5.37 14.02,5.36 v14.6,5.36 | U1.P$AD14 29.15,13.85 v29.2,13.8 29.74,13.26 Q1.2 | U1.P$AD23 32.62,14.58 32.72,14.48 v33.25,14.48 | R_PWR_EPD.2 33.08,9.93 33.22,9.93 34.09,10.8 v34.2,10.8 | v25.2,21 25.62,20.58 U1.P$B1 | IC9.E2 6.43,4.53 v5.5,3.6 | TP_3.3V.TP 43.48,6.07 TP_3V3.TP | 25.8,4.9 27.1,3.6 C14.1 C6.1 29.85,5.91 C19.1 30.81,6.01 C12.1 | IC2.C2 18.36,19.38 R17.1 18.58,19.43 18.79,19.64 18.79,19.78 R18.1 19.77,19.93 19.8,19.9 v20.08,19.9 | 25.8,4.9 v25.96,5.06 | U1.P$A22 31.15,22.67 v31.6,23.12 | U1.P$Y2 25.9,15.83 U1.P$W1 25.53,16.2 24.9,16.2 24.7,16.4 v24.5,16.4 | v17.7,15.2 17.7,14.55 17.8,14.46 17.8,14.24 IC3.7 | IC3.3 17.37,12.23 v17.7,11.9 | v16.4,14.9 16.37,14.87 IC3.10
  Route15 0.3: v41.7,8.6 40.2,8.6 35.85,12.95 | 35.85,12.95 34.22,14.58 34.18,14.58 v34.1,14.5 33.55,13.95 33.25,13.95 | v37.1,5.1 26,5.1 v25.96,5.06 15.44,5.06 15.17,5.34 14.6,5.34 | 33.25,13.95 29.35,13.95 v29.2,13.8 28.2,13.8 27.5,14.5 26.7,14.5 26.15,15.04 26.15,15.25 25.16,16.24 24.66,16.24 v24.5,16.4 24.48,16.4 20.98,19.9 | 33.25,13.95 v33.25,14.48 | v34.2,10.8 35.85,12.45 35.85,12.95 | v5.5,3.6 12.9,3.6 14.6,5.3 14.6,5.34 | 14.6,5.34 v14.6,5.36 14.54,5.36 11.2,8.7 11.2,15.53 11.73,16.05 12.27,16.05 12.93,15.4 16.1,15.4 | v31.6,23.12 26.42,23.12 25.2,21.9 v25.2,21 25.1,20.9 25.1,20.7 24.3,19.9 20.98,19.9 | v17.7,11.9 v17.7,15.2 17.5,15.4 16.1,15.4 | 20.98,19.9 v20.08,19.9 | 16.1,15.4 16.4,15.1 v16.4,14.9
ALERT  (via drill 0.35)
  Top 0.15: U3.5 4.48,25.68 3.8,25 1.8,25 0.4,26.4 0.4,28.56 0.45,29.16 0.75,30.27 1.08,30.98 3.95,33.85 16.92,33.85 18.68,32.09 35.8,32.09 36.5,32.79 36.5,32.93 37.96,34.39 40.67,34.39 42.6,32.47 42.6,31.6 41.07,31.6 39.08,29.61 39.08,28.59 37.8,27.31 v37.8,22.6 | v33,18.06 32.67,18.06 U1.P$J24
  Bottom 0.15: v37.8,22.6 33.26,18.06 v33,18.06
D+  (via drill 0.35)
  Top 0.15: v21.95,22.8 22.2,23.05 D3.4 | U1.P$AD6 27.15,13.37 v26.9,13.12
  Bottom 0.15: v21.95,22.8 22.55,22.2 22.55,16.11 25.74,12.92 26.7,12.92 v26.9,13.12
D-  (via drill 0.35)
  Top 0.15: U1.P$AD4 26.2,15.03 25.45,15.03 v24.89,15.59 | v25.2,24.1 24.22,24.1 D3.6
  Bottom 0.15: v25.2,24.1 24.07,24.1 22.83,22.86 22.83,17.27 24.7,15.4 v24.89,15.59
DN
  Top 0.15: D3.1 24.1,27.9 23.85,28.15 | 23.85,28.15 23.75,28.25 J4.B7 | 23.85,28.15 23.7,28 22.9,28 22.75,28.15 J4.A7
DP
  Top 0.15: D3.3 22.2,28.93 J4.B6 22.25,29.75 22.7,30.2 23,30.2 23.25,29.95 J4.A6
EPD_3V3  (via drill 0.35)
  Top 0.3: Q1.3 31.51,9.4 v31.8,9.4 | v25.3,6.7 24.44,7.56 L5.2 | J1.15 J1.16 10.7,15.68 11.22,15.68 11.5,15.4 v12,15.4 | EPD_C5.2 12.04,15.36 v12,15.4 | v12,15.4 12,15.73 C1-EP-DR.2
  Route15 0.3: v12,15.4 12,9.6 14.9,6.7 v25.3,6.7 27.95,9.35 29.07,9.35 29.13,9.4 v31.8,9.4
EPD_BUSY  (via drill 0.35)
  Top 0.15: U1.P$AD12 28.65,13.15 28.84,12.96 v28.84,12.9 | v11.6,19.7 11.15,19.25 J1.9
  Bottom 0.15: v11.6,19.7 9.41,19.7 7.63,17.92 7.63,5.98 10.25,3.35 14.46,3.35 14.47,3.35 25.46,3.35 25.61,3.2 26.1,3.2 29.48,6.58 29.48,11.21 28.84,11.86 v28.84,12.9
EPD_CS  (via drill 0.15, 0.35)
  Top 0.15: J1.12 14.45,17.75 v16.1,16.1 | v19.8,16.2 22.5,18.9 v23.41,18.9
  Bottom 0.15: v19.8,16.2 16.2,16.2 v16.1,16.1 | U1.P$K2 25.58,18.9 v23.41,18.9
  other vias: 26.15,18.33
EPD_DC  (via drill 0.35)
  Top 0.15: U1.P$AD10 28.15,12.65 28.65,12.15 28.65,10.03 v28.62,10 | v11.6,18.33 11.52,18.25 J1.11
  Bottom 0.15: v28.62,10 28.62,6.81 25.72,3.91 10.72,3.91 8.18,6.44 8.18,14.78 11.6,18.2 v11.6,18.33
EPD_RST  (via drill 0.15, 0.35)
  Top 0.15: J1.10 10.77,18.9 11.19,18.9 11.29,19 v12.3,19
  Bottom 0.15: v12.3,19 9.1,19 7.9,17.8 7.9,6.29 10.57,3.63 24.77,3.63 24.78,3.62 25.82,3.62 29.2,7 29.2,10.3 28.6,10.9 28.6,11.7 28.3,12 28.3,14.98 U1.P$AC11
  other vias: 28.4,15.08
GDR
  Top 0.15: J1.2 10.77,22.9 11.06,22.9 11.33,23.17 11.4,23.17 | 11.4,23.17 R2_EP_DR.2 | Q3.1 19.3,10.55 19.3,14.24 16.54,17 15.8,17 14.08,18.72 14.08,22.08 13.96,22.2 13.7,22.2 12.3,23.6 12.3,23.7 11.93,23.7 11.4,23.17
GND  (via drill 0.35)
  Top 0.15: J2.3 J2.5 43.03,16.62 43.28,16.62 44.8,18.14 44.8,21.9 | 44.8,21.9 44.8,22 | 44.8,21.9 44.62,22.08 TP_GND.TP | X1.4 34.44,22.14 34.44,22.17 34.94,22.68 34.94,22.94 X1.2 | U1.P$F23 31,19.33 U1.P$78 | C42.1 27.32,27.8 J4.SH3 26.77,29.55 J4.A1_B12 | IC9.C3 IC9.C2 IC9.C1 IC9.B1 | U1.P$B7 27.4,19.93 U1.P$75 | EPD_C1.1 13.58,20.56 EPD_C2.1 13.55,21.65 R2_EP_DR.1 | J1.17 11.15,15.25 11.7,14.7 13.32,14.7 13.68,15.06 13.68,15.19 EPD_C5.1 | J1.8 10.77,19.9 11.06,19.9 11.18,20.02 11.18,20.08 11.5,20.4 11.74,20.4 12.64,19.5 v13.3,19.5 | J4.SH4 19.25,28.98 J4.A12_B1 | C16.2 26.43,23.32 C17.1 | U1.P$74 U1.P$85 | U3.9 3.95,26.61 4.04,26.52 4.32,26.52 U3.6
  other vias: 44.51,29.99 43.2,22.4 36.4,3.6 32.7,21.6 36.1,19.2 16.1,10.9 14.8,4.48 8.76,6.51 25.27,4.38 31.08,24.54 24.19,21.11 23.1,14.3 40.2,32 40.4,29.5 28.8,24.4 14.59,20.29 17.2,17.9 16.9,21 5,9.3
  pour Top: 40.77,26.03 40.75,26.05 40.75,28.96 40.77,28.98 41.1,29.31 41.12,29.33 49.53,29.33 49.53,36.4 46.39,39.54 -5.33,39.54 -5.33,-1.9 -2.84,-4.39 52.67,-4.39 52.67,19.73 46.41,25.99 40.81,25.99 40.79,26.01
  pour Bottom: 40.79,25.92 40.77,25.94 40.71,26 40.69,26.02 40.69,29.15 40.71,29.17 40.73,29.19 40.75,29.21 49.68,29.21 50.16,29.69 50.16,36.73 46.91,39.98 -5.78,39.98 -5.78,-2.79 -3.16,-5.41 54.08,-5.41 54.12,-5.37 54.12,21.96 50.16,25.92
  pour Route2: 40.86,26.18 40.84,26.2 40.84,28.94 40.86,28.96 41.02,29.12 41.04,29.14 50.57,29.14 50.57,37.12 47.27,40.42 -6.17,40.42 -6.17,-4.13 -3.36,-6.94 54.46,-6.94 54.54,-6.86 54.54,22.2 50.48,26.26 46.46,26.26 46.31,26.12 46.29,26.1 40.94,26.1 40.92,26.12
HAPTIC_EN
  Top 0.15: IC2.A1 16.5,17.6 16.8,17.3 17.9,17.3 19.5,15.7 19.5,14.9 20.5,13.9 21.8,13.9 23.7,15.8 23.7,16.3 24.3,16.9 24.7,16.9 25.02,16.58 U1.P$U1
IMU_INT1  (via drill 0.35)
  Top 0.15: IC3.5 18.66,13.14 v18.7,13.1 | U1.P$N1 25.35,17.88 24.5,17.88 21.82,15.2 v21.42,15.2
  Bottom 0.15: v18.7,13.1 20.8,15.2 v21.42,15.2
IMU_INT2  (via drill 0.15, 0.35)
  Top 0.15: v25.05,17.38 24.87,17.2 24.21,17.2 23.42,16.41 23.42,16.26 21.91,14.75 21.23,14.75 20.88,15.1 v20,15.1 | v18.6,14.1 18.42,14.1 18.1,13.79 18.04,13.79 IC3.6
  Bottom 0.15: v18.6,14.1 19.6,15.1 v20,15.1 | v25.05,17.38 25.09,17.33 U1.P$P2
  other vias: 26.15,17.33
LX1
  Top 0.15: IC9.B2 IC9.B3 8.2,2.04 L7.1
LX2
  Top 0.15: IC9.D2 IC9.D3 7.31,4.04 7.31,4 6.76,3.45 6.76,2.43 L7.2
MOSI  (via drill 0.15, 0.35)
  Top 0.15: J1.14 10.34,16.75 10.07,17.02 10.07,17.03 9.8,17.3 9.8,25 13.5,28.7 16.56,28.7 17.4,29.54 17.4,30.5 18.7,31.8 34.8,31.8 36.68,29.92 36.68,28.59 37.1,28.17 v37.1,24.5
  Bottom 0.15: v37.1,24.5 33.18,20.58 U1.P$B13
  other vias: 28.9,20.58
N$1
  Top 0.15: IC1.D1 15.33,25.37 R9.2
N$2
  Top 0.15: C9.1 32.39,17.34 U1.P$N24
N$3
  Top 0.15: R4.2 7.31,5.02 IC9.D1
N$4  (via drill 0.15, 0.35)
  Top 0.15: v26.2,13.88 25.25,13.88 C20.1
  Bottom 0.15: v26.2,13.88 26.27,13.88 26.9,14.5 U1.P$AC5
  other vias: 26.9,15.08
N$5
  Top 0.15: ANT1.1 42.07,29.77
  Top 0.152: 42.07,29.77 C22.1 | C22.1 42.04,29.82 L1.2 | C22.1 42.11,29.8 C4.1
N$6
  Top 0.15: L3.1 27.56,23.61 L2.2
N$7
  Top 0.15: R2.2 6.77,5.16 IC9.E1
N$8
  Top 0.15: C5.1 25.02,20.08 U1.P$C1
N$9  (via drill 0.35)
  Top 0.15: v22.5,13.6 22.91,13.6 L5.1 21.16,8.93 21.16,8.53 20.06,7.43 Q3.3 | v15.7,30.8 16.62,30.8 C2-EP-DR.1 16.46,30.96 D5.2
  Bottom 0.15: v15.7,30.8 15.7,30.6 21.5,24.8 21.5,20.19 22.28,19.41 22.28,16 22.5,15.77 v22.5,13.6
N$10
  Top 0.15: IC3.1 16.15,12.39 R3.2
N$11  (via drill 0.35)
  Top 0.15: 25.64,22.1 C17.2 | 25.64,22.1 v26.4,22.1 | v35,26 35,27.79 X2.2 | 25.64,22.1 25.64,21.6 26,21.24 26,19.98 U1.P$D2
  Bottom 0.15: v26.4,22.1 27.8,23.5 31.34,23.5 31.41,23.57 33.37,23.57 35,25.2 v35,26
N$12  (via drill 0.35)
  Top 0.15: v33,25.9 32.52,26.38 X2.1 | U1.P$F2 25.83,19.33 25.51,19.64 24.26,19.64 23.57,20.33 v23.57,21.93 24.38,21.93 C18.2
  Bottom 0.15: v23.57,21.93 25.32,21.93 27.18,23.78 31.07,23.78 31.54,24.25 31.54,24.44 v33,25.9
N$13
  Top 0.15: C2-EP-DR.2 15.82,29.75 15.71,29.86 15.44,29.86 15.4,29.9 13.17,29.9 D2.1 11.52,28.45 D4.2
N$14
  Top 0.15: R1_EP_DR.1 2.49,7.84 R_TYPE_SEL.2 4.57,7.81 SJ1.2
N$15
  Top 0.15: J1.4 12.48,21.75 EPD_C2.2
N$16
  Top 0.15: IC2.A2 16.38,19.26 C32.2
N$17
  Top 0.15: J1.18 10.77,14.6 11.06,14.6 11.71,13.95 EPD_C6.2
N$18
  Top 0.15: R1_USB.2 24.25,28.36 J4.A5
N$19
  Top 0.15: L1.1 40.54,30.68 39.4,29.54 39.4,26.9 42.2,24.1 42.2,23 40.9,21.7 37.5,21.7 36.9,21.1 36.9,19.1 36.35,18.55 32.61,18.55 32.27,18.88 32.02,18.88 31.97,18.83 U1.P$H23
  Top 0.152: C3.1 42.79,30.77 42.37,31.18 41.54,31.18 L1.1
N$20
  Top 0.15: U1.P$B24 32.75,20.58 33.19,20.14 35.77,20.14 35.77,21.71 X1.1 35.47,21.55 C1.1
N$21
  Top 0.15: X1.3 32.91,23.46 31.99,22.54 | U1.P$A23 31.65,22.2 31.98,22.52 31.99,22.54 | C2.1 31.99,22.54
N$22
  Top 0.15: R2_USB.1 21.09,28.3 21.1,28.32 21.1,28.83 J4.B5
N$23
  Top 0.15: C11.1 32.96,19.24 32.3,19.9 31.72,19.9 U1.P$D23
N$24
  Top 0.15: L2.1 27.36,21.61 27.07,21.32 27.07,21.25 U1.P$B3
N$25
  Top 0.15: EPD_C1.2 11.83,21.25 J1.5
N$26
  Top 0.15: C15.1 29.43,23.37 29.43,24.77 L3.2 28.06,26.14 27.23,26.14 26.44,25.36 C16.1 | U1.P$B5 26.9,20.69 27.35,21.14 27.35,21.2 27.64,21.49 27.64,21.58 C15.1 | U1.P$E24 32.91,18.82 34.14,18.82 34.31,18.99 C10.1 34.7,19.12 34.99,19.41 35.43,19.41 36.6,20.58 36.6,23.52 34.97,25.14 28.5,25.14 27.9,24.54 27.9,23.01 28.45,22.45 C15.1
N$27
  Top 0.15: C13.1 30.15,21.77 U1.P$A18
N$28
  Top 0.15: J1.20 10.77,13.6 11.06,13.6 12.83,11.83 EPD_C8.2
N$29
  Top 0.15: J1.19 10.77,14.1 11.06,14.1 12.31,12.85 EPD_C7.2
N$30
  Top 0.15: J1.22 10.77,12.6 11.06,12.6 12.33,11.33 12.33,11.32 12.7,10.94 EPD_C10.2
N$31
  Top 0.15: EPD_C12.2 J1.24
N$32
  Top 0.15: C27.2 2.41,26.96 U3.2 U3.3
OUT+
  Top 0.15: IC2.A3 15.34,21.04 TP_OP.TP
OUT-
  Top 0.15: IC2.C3 17.5,20.4 18.2,21.1 TP_ON.TP
P0.13
  Top 0.15: SW_UP.2 10.6,5.18 C30.2 10.72,5.3 10.72,5.44 10.84,5.56 12.88,5.56 R5.1 13.29,5.59 13.29,5.63 13.56,5.9 21.73,5.9 22.08,6.24 26.84,6.24 27.54,6.95 27.54,11.68 27.65,11.79 U1.P$AD8
P0.14  (via drill 0.15, 0.35)
  Top 0.15: SW_ENT.2 21.6,5.23 C31.2 21.96,5.6 21.96,5.74 22.15,5.92 23.73,5.92 R8.1 24.29,5.81 24.29,5.85 24.41,5.97 26.95,5.97 28.17,7.18 28.17,11.31 v27.99,11.49
  Bottom 0.15: U1.P$AC9 27.9,12 27.99,11.91 v27.99,11.49
  other vias: 27.9,15.08
P1.01  (via drill 0.15, 0.35)
  Top 0.15: v31.5,13.2 31.5,12.46 Q1.1 31.64,11.62 R_PWR_EPD.1
  Bottom 0.15: v31.5,13.2 32.2,13.9 34.9,13.9 37,16 37,16.4 38.1,17.5 38.1,17.8 37.8,18.1 34.5,18.1 32.23,15.83 U1.P$Y23
  other vias: 31.65,15.83
P1.02  (via drill 0.35)
  Top 0.15: SW_DN.2 32.6,5.31 C29.2 | R7.1 34.66,5.73 32.87,5.73 32.68,5.54 32.68,5.4 C29.2 | C29.2 32.62,8.12 v36.19,11.69 | v37.59,16.1 35.83,16.1 35.52,15.79 34.52,15.79 34.23,16.08 U1.P$W24
  Bottom 0.15: v36.19,11.69 v36.2,11.7 36.2,14.7 37.59,16.09 v37.59,16.1
PMIC_INT  (via drill 0.15, 0.35)
  Top 0.15: IC1.A1 15.33,23.34 v15.5,23.18
  Bottom 0.15: U1.P$T2 25.75,16.43 25.75,14.35 25.4,14 25.4,13.8 25.9,13.3 26.3,13.3 26.8,13.8 27.3,13.8 27.6,13.5 27.6,12.6 27,12 22.4,12 21.5,12.9 21.5,13.5 22,14 22,19.3 20.9,20.4 20.9,20.5 17,24.4 15.9,24.4 14.2,26.1 5.6,26.1 5.5,26 5.5,25.1 5.8,24.8 10.4,24.8 12.03,23.18 v15.5,23.18
  other vias: 26.15,16.83
PREVGH
  Top 0.15: EPD_C9.2 12.96,31.47 D5.1 12.41,32.4 10.3,32.4 10.2,32.3 10.2,25.9 9.2,24.9 9.2,14.39 10.19,13.4 10.48,13.4 J1.21
PREVGL
  Top 0.15: J1.23 10.48,12.4 10.19,12.4 8.9,13.69 8.9,25.77 EPD_C11.2 8.12,26.55 D2.2
RESE  (via drill 0.35)
  Top 0.15: v11.8,22.4 11.65,22.25 J1.3 | Q3.2 17.97,7.7 12.1,7.7 9.25,4.85 9.25,0.75 8.9,0.4 6.44,0.4 5.84,0.45 5.44,0.56 5.4,0.6 1.65,4.35 R1_EP_DR.2 1.43,7.51 1.39,7.51 1.27,7.63 1.27,8.04 1.39,8.16 2.46,8.16 4.25,9.95 v7.04,9.95
  Bottom 0.15: v11.8,22.4 10,22.4 7.35,19.75 7.35,10.25 v7.04,9.95
RESET  (via drill 0.15, 0.35)
  Top 0.15: J2.6 41.3,16.66 41.72,17.09 41.72,17.76 41.25,18.24 40.66,18.24 40.6,18.3 38.4,18.3 37.56,17.46 v37.24,17.46 36.77,16.99 TP_RESET.TP
  Bottom 0.15: v37.24,17.46 34.86,15.08 U1.P$AC13
  other vias: 28.9,15.08
SCK  (via drill 0.35)
  Top 0.15: J1.13 10.48,17.4 10.19,17.4 10.07,17.52 10.07,24.67 13.7,28.3 16.9,28.3 17.68,29.08 17.68,30.26 18.92,31.5 30.1,31.5 31.7,29.9 v31.7,29.5 | U1.P$A12 30.09,22.52 30.09,22.86 30.1,22.87 v30.1,24.56
  Bottom 0.15: v31.7,29.5 30.1,27.9 v30.1,24.56
SCL  (via drill 0.15, 0.35)
  Top 0.15: 15.84,12.99 15.52,12.67 15.52,9.42 14.1,8 8.04,8 7.92,7.88 7.92,7.74 R4.1 | 15.84,12.99 16.2,12.99 IC3.12 | TP_SCL.TP 5.4,29.07 5.4,27.2 5.06,26.86 U3.7 4.94,26.86 v6.3,25.5 | IC1.B1 15.43,24.05 15.46,24.05 15.84,23.66 v16.84,23.66 | IC2.C1 R17.2 18.52,18.89 v19.2,18.2 | v24.6,18.4 23.35,19.65 22.61,19.65 21.96,19 v20.4,19 | v15.7,14.3 15.7,13.13 15.84,12.99
  Bottom 0.15: 17.03,23.47 16.83,23.27 16.05,23.27 13.82,25.5 v6.3,25.5 | 17.03,23.47 17.03,22.17 18.1,21.1 19.3,21.1 19.5,20.9 19.5,18.5 v19.2,18.2 | v19.2,18.2 19.6,18.2 v20.4,19 | v24.6,18.4 25.58,18.4 U1.P$M2 | 17.03,23.47 v16.84,23.66 | v19.2,18.2 18.1,17.1 16,17.1 15.4,16.5 15.4,14.6 v15.7,14.3
  other vias: 26.15,17.83
SDA  (via drill 0.15, 0.35)
  Top 0.15: R2.1 6.93,7.3 6.93,7.34 7.99,8.4 14,8.4 14.94,9.34 v14.94,9.9 | R18.2 18.61,20.15 18.61,20.19 19,20.58 19,20.61 | 19,20.61 19.41,21.02 19.41,21.8 | 19.41,21.8 19.41,23.52 TP_SDA.TP 18.2,24.55 IC1.C1 15.43,24.65 15.46,24.65 15.86,25.05 v16.25,25.05 | U3.8 3.4,28.44 v3.4,28.99 v3.39,29 | v18.51,20.52 18.6,20.61 19,20.61 | 19.41,21.8 20.21,21 22.51,21 24.15,19.37 24.36,19.37 U1.P$L1 | IC3.2 16.87,11.23 v16.95,11.15
  Bottom 0.15: v16.95,11.15 16.95,10.85 16,9.9 v14.94,9.9 15.04,10 15.04,17.42 IC2.B2 17.25,19.38 18.39,20.52 v18.51,20.52 | v3.39,29 12.3,29 v16.25,25.05
  other vias: 17,19.38
SWDCLK
  Top 0.15: J2.4 40.6,14.19 40.6,14.2 40.19,14.2 40.01,14.02 38.77,14.02 37.89,14.9 37.89,14.91 37.22,15.58 35.8,15.58 | TP_SWDCLK.TP 36.68,14.7 35.8,15.58 | 35.8,15.58 35.7,15.58 35.63,15.51 34.41,15.51 34.34,15.58 U1.P$AA24
SWDIO
  Top 0.15: U1.P$AC24 32.23,15 34.24,15 35.38,13.86 35.38,13.59 38.12,10.85 39.2,10.85 | J2.2 41.3,12.86 41.12,12.68 41.12,11.96 40.01,10.85 39.2,10.85 | TP_SWDIO.TP 39.95,10.1 39.2,10.85
SWO
  Top 0.15: TP_SWO.TP 33.24,12.49 U1.P$AD22
VBAT  (via drill 0.35)
  Top 0.15: 33.5,33.3 32.95,33.3 C37.2 32.91,32.69 | IC1.C2 14.83,24.65 14.8,24.65 14.55,24.9 v13.04,24.9
  Top 0.3: TP_VBAT.TP 33.51,33.29 33.5,33.3 | 32.91,32.69 33.05,32.55 v33.1,32.55
  Route15 0.3: v33.1,32.55 33.05,32.5 19.82,32.5 13.27,25.96 13.27,25.13 v13.04,24.9
VBUS  (via drill 0.35)
  Top 0.15: IC1.A2 14.58,23.4 14.5,23.4 | 26.32,27.09 C42.2 28.54,27.09 | C38.2 29.98,27.02
  Top 0.3: 26.32,27.09 v26.1,27.3 26.1,27.81 25.62,28.29 25.62,28.75 J4.A4_B9 25.4,29.55 24.4,30.55 21.6,30.55 20.6,29.55 J4.A9_B4 20.38,28.75 20.38,28.29 19.9,27.81 v19.9,27.4 | 28.54,27.09 C21.1 29.86,26.97 C43.1 29.98,27.02 | 14.5,23.4 14.4,23.3 14.4,22.86 v14.18,22.64 | v23.41,22.8 23.15,23.06 D3.5 | v25.1,14.71 25.23,14.58 U1.P$AD2
  Route15 0.3: v26.1,27.3 26.1,23.9 25,22.8 v23.41,22.8 21.21,20.6 19.57,20.6 19.14,20.17 19.14,19.25 23.7,14.71 v25.1,14.71 | v19.9,27.4 19.9,25.8 16.4,22.3 14.52,22.3 v14.18,22.64
VREG  (via drill 0.35)
  Top 0.15: IC9.A1 IC9.A2 IC9.A3 | 40.8,32.7 41.36,32.7 C23.1
  Top 0.3: v10.5,7.2 10.25,7.45 C39.2 9.42,6.79 9.59,6.63 9.59,5.91 IC9.A1 | IC1.B2 14.91,24.17 13.86,24.17 v13.7,24.02 | 40.8,32.7 40.31,33.19 TP_VREG.TP 37.47,32.2 v37.1,32.2 | C24.2 6.15,7.85 v6.3,7.7
  Route15 0.3: v10.5,7.2 10.15,7.55 10,7.7 | 10,7.7 8.8,8.9 8.2,8.9 8,9.1 8,20 12.02,24.02 v13.7,24.02 13.7,25.6 17.82,29.72 17.82,29.91 19.82,31.9 36.8,31.9 v37.1,32.2 | v6.3,7.7 10,7.7